# Altium PCB beta1.PCBDOC
Units mm, origin at the board's own origin, x right, y up, seen from the top; angles counter-clockwise.
Board outline 152.4 x 101.6 mm, 2 copper layers (Top Layer, Bottom Layer); 32 components, 39 nets, 118 pads, 0 vias.
Unrouted connection lines stored in the file: 1.
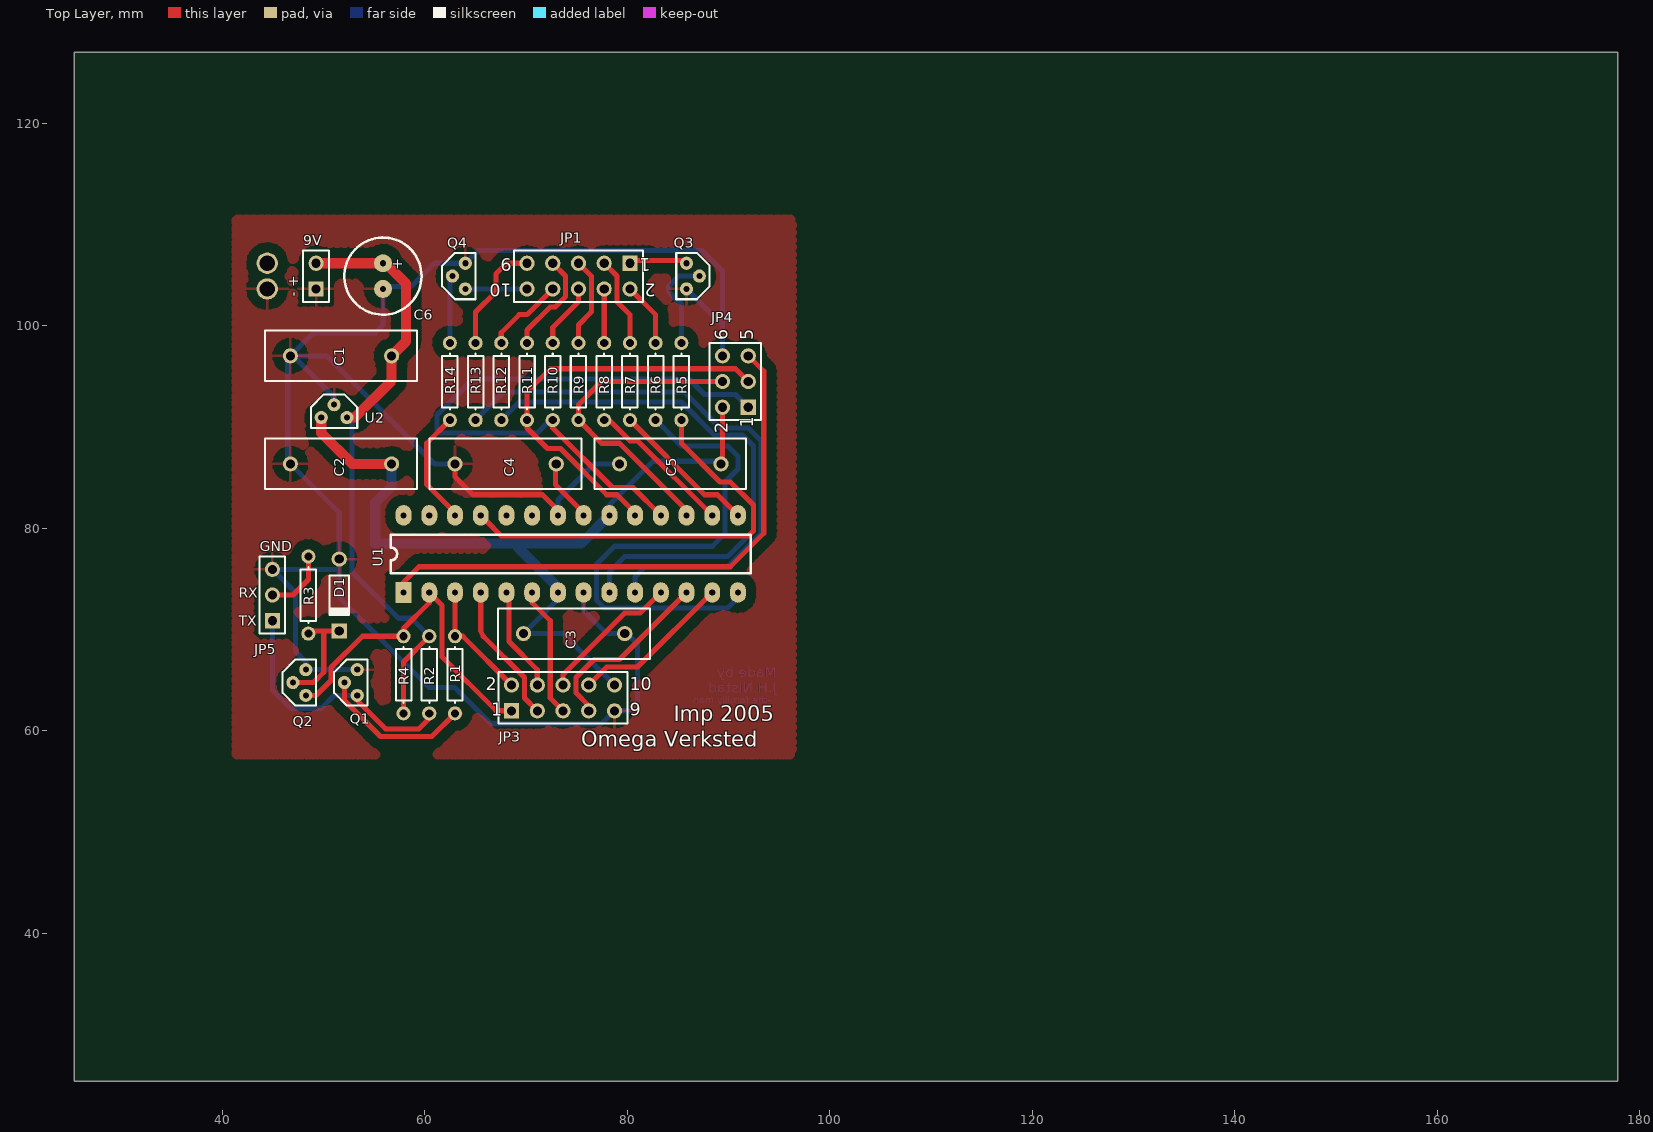
[diagram p0: Top Layer view]
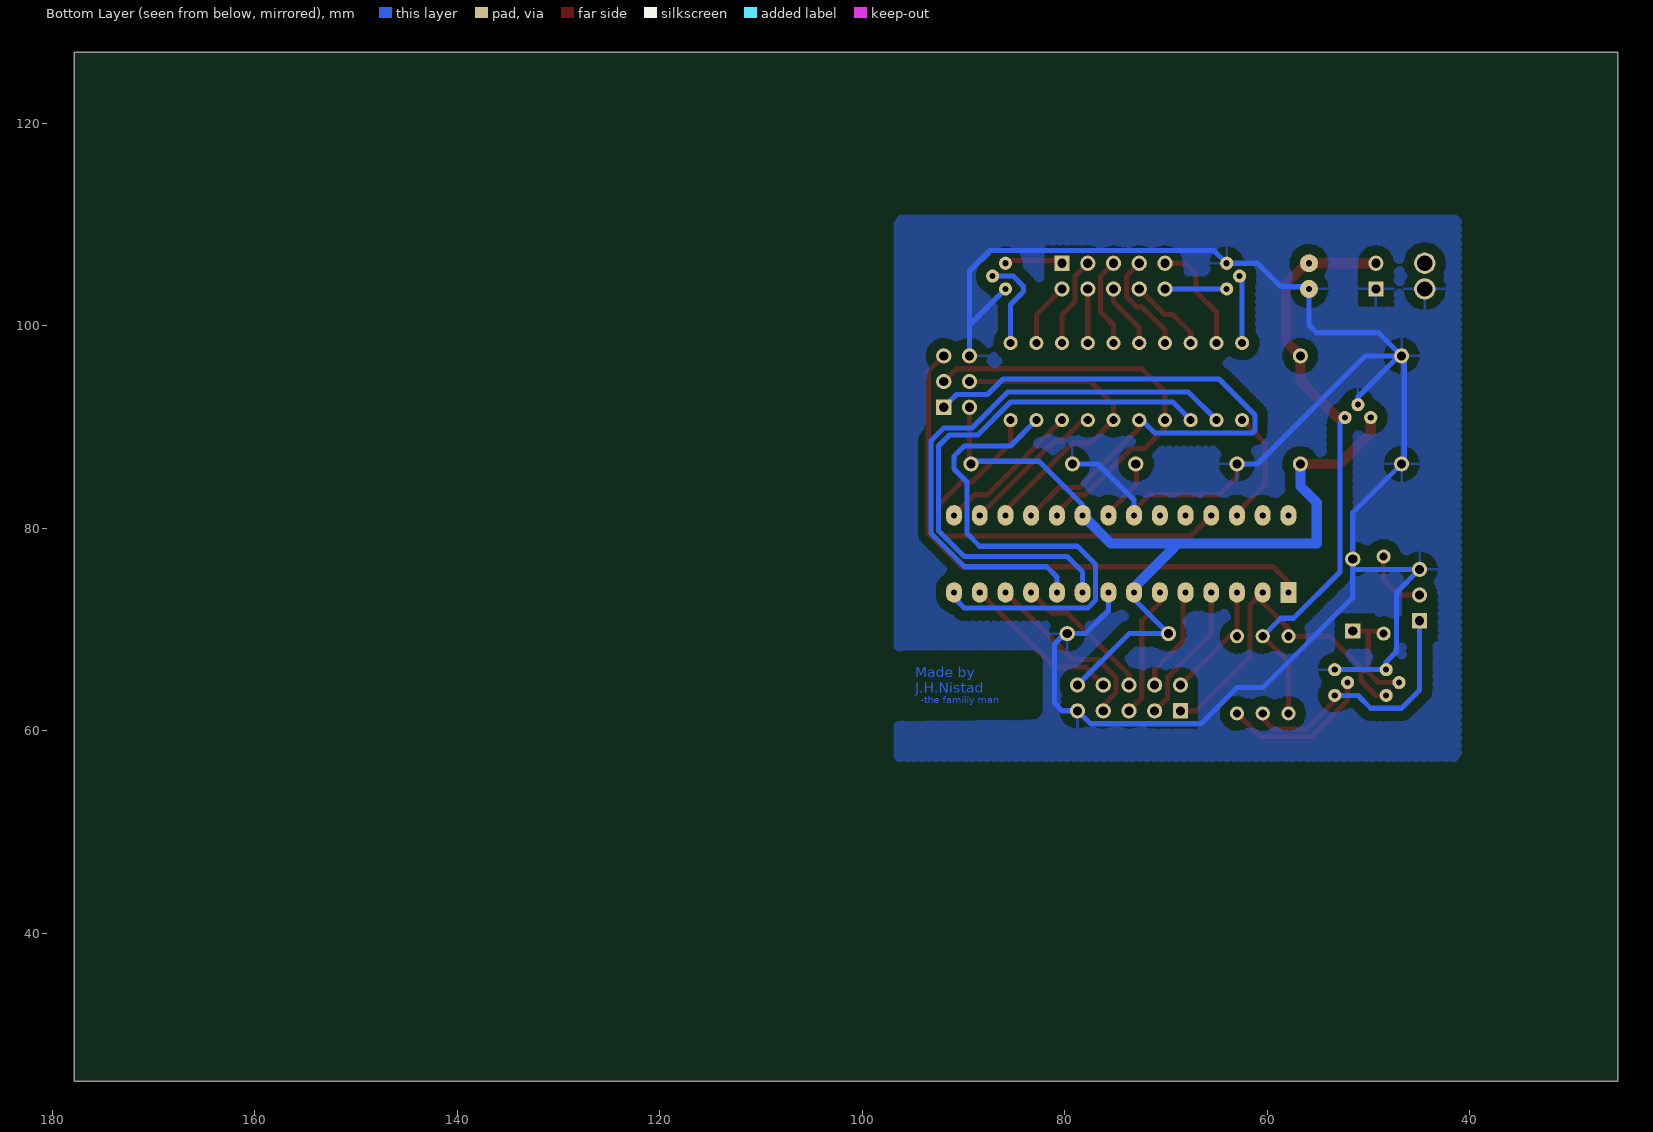
[diagram p1: Bottom Layer view, seen from below]

## Layer stack, top to bottom
Top Layer: signal copper 0.0356
Dielectric: dielectric 0.32, FR-4, Dk 4.8
Bottom Layer: signal copper 0.0356

## Board outline
25.4,25.4 177.8,25.4 177.8,127 25.4,127

## Design rules (kind name [scope] priority, off if disabled: settings)
Clearance [All] p1: gap=0.2
ComponentClearance [All] p1: gap=0.254 collisioncheckmode=0
MinimumAnnularRing [All] p1: minimumring=0.3
PolygonConnect [All] p1: connectstyle=Relief reliefconductorwidth=0.254 reliefentries=4 polygonreliefangle="90 Angle"
RoutingLayers [All] p1: top layer=Horizontal bottom layer="Not Used"
RoutingVias [All] p1: holewidth=0.711 width=1.27 viastyle="Through Hole" minholewidth=0.711 minwidth=1.27 maxholewidth=0.711 maxwidth=1.27
SolderMaskExpansion [All] p1: expansion=0.102
TestPointUsage [All] p1: valid=0 allowmultiple=FALSE
Testpoint [All] p1: side=15 testpointundercomponent=TRUE minsize=1.016 maxsize=2.54 preferedsize=1.524 minholesize=0 maxholesize=1.016 preferedholesize=0.813 testpointgrid=0.025 style=1023 order=1234567890
Width [All] p1: maxlimit=1 minlimit=0.254 preferedwidth=0.508
16 further rules are at their usual default settings.

## Components (designator, comment, footprint, x,y, rotation, side; value= is the part's Value field where it differs from the comment)
9V "Header 2" HDR1X2 49.276,103.632 r90 top (schematic designator JP2)
C1 "Cap" impcap 46.736,97.028 r0 top
C2 "Cap" impcap 46.736,86.36 r0 top
C3 "Cap" impcap 79.756,69.596 r180 top
C4 "Cap" impcap 62.992,86.36 r0 top
C5 "Cap" impcap 79.248,86.36 r0 top
C6 "Cap Pol1" RB.1/.3 55.88,106.172 r270 top
D1 "1N914" DIO7.1-3.9x1.9 51.562,73.406 r270 top
JP1 "Header 5X2" HDR2X5 80.264,106.172 r180 top
JP3 "Header 5X2" HDR2X5 68.58,61.976 r0 top
JP4 "Header 3X2" HDR2X3 91.948,91.948 r90 top
JP5 "Header 3" HDR1X3 44.958,70.866 r90 top
Q1 "BC547A" TO-92var2 53.34,66.04 r270 top
Q2 "BC547A" TO-92var2 48.26,66.04 r270 top
Q3 "BC547A" TO-92var2 85.852,103.632 r90 top
Q4 "BC547A" TO-92var2 64.008,106.172 r270 top
R1 "Res1" AXIAL-0.3 62.992,65.532 r270 top
R2 "Res1" AXIAL-0.3 60.452,65.532 r90 top
R3 "Res1" AXIAL-0.3 48.514,73.406 r270 top
R4 "Res1" AXIAL-0.3 57.912,65.532 r90 top
R5 "" AXIAL-0.3 85.344,94.488 r90 top
R6 "" AXIAL-0.3 82.804,94.488 r90 top
R7 "" AXIAL-0.3 80.264,94.488 r90 top
R8 "" AXIAL-0.3 77.724,94.488 r90 top
R9 "" AXIAL-0.3 75.184,94.488 r90 top
R10 "" AXIAL-0.3 72.644,94.488 r90 top
R11 "" AXIAL-0.3 70.104,94.488 r90 top
R12 "" AXIAL-0.3 67.564,94.488 r90 top
R13 "" AXIAL-0.3 65.024,94.488 r90 top
R14 "" AXIAL-0.3 62.484,94.488 r90 top
U1 "ATMEGA8_DIP28" DIP-28 57.912,73.66 r90 top
U2 "MC78L05CP" TO-92var2 52.324,90.932 r180 top

## Footprints (in the part's own frame and the unit in brackets; to place one, negate y for a bottom-side part, rotate by r counter-clockwise, add the part's x,y. Pads: shape width x height; smd on the part's side, far side on the other; paste and mask are expansions set on the pad)
AXIAL-0.3 [mm]
  round 1.4 hole 0.8: 1(-3.81,0) 2(3.81,0)
  silkscreen extent -2.77,-0.76 2.77,0.76
DIO7.1-3.9x1.9 [mm]
  round 1.5 hole 0.9: 1(-3.55,0)
  rect 1.5x1.5 hole 0.9: 2(3.55,0)
  silkscreen extent -1.95,-0.95 2.05,0.95
DIP-28 [mil]
  rect 80x62 hole 23.62: 1(0,0)
  oval 80x62 hole 23.62: 2(0,-100) 3(0,-200) 4(0,-300) 5(0,-400) 6(0,-500) 7(0,-600) 8(0,-700) 9(0,-800) 10(0,-900) 11(0,-1000) 12(0,-1100) 13(0,-1200) 14(0,-1300) 15(300,-1300) 16(300,-1200) 17(300,-1100) 18(300,-1000) 19(300,-900) 20(300,-800) 21(300,-700) 22(300,-600) 23(300,-500) 24(300,-400) 25(300,-300) 26(300,-200) 27(300,-100) 28(300,0)
  silkscreen extent 75,-1350 225,50
HDR1X2 [mm]
  rect 1.5x1.5 hole 0.9: 1(0,0)
  round 1.5 hole 0.9: 2(2.54,0)
  silkscreen extent -1.27,-1.27 3.81,1.27
HDR1X3 [mm]
  rect 1.5x1.5 hole 0.9: 1(0,0)
  round 1.5 hole 0.9: 2(2.54,0) 3(5.08,0)
  silkscreen extent -1.27,-1.27 6.35,1.27
HDR2X3 [mm]
  rect 1.5x1.5 hole 0.9: 1(0,0)
  round 1.5 hole 0.9: 2(0,2.54) 3(2.54,0) 4(2.54,2.54) 5(5.08,0) 6(5.08,2.54)
  silkscreen extent -1.27,-1.27 6.35,3.81
HDR2X5 [mm]
  rect 1.5x1.5 hole 0.9: 1(0,0)
  round 1.5 hole 0.9: 2(0,2.54) 3(2.54,0) 4(2.54,2.54) 5(5.08,0) 6(5.08,2.54) 7(7.62,0) 8(7.62,2.54) 9(10.16,0) 10(10.16,2.54)
  silkscreen extent -1.27,-1.27 11.43,3.81
impcap [mm]
  round 1.5 hole 0.9: 1(0,0) 2(10,0)
  silkscreen extent -2.5,-2.5 12.5,2.5
RB.1/.3 [mil]
  round 70 hole 23.62: 1(0,0) 2(100,0)
  silkscreen extent -100,-150 200,150
TO-92var2 [mm]
  round 1.3 hole 0.6: 1(2.54,0) 2(1.27,-1.27) 3(0,0)
  silkscreen extent -1.02,-2.29 3.56,1.02

## Part data
9V: "Header, 2-Pin"
C1 C2 C3 C4 C5: "Capacitor"
C6: "Polarized Capacitor (Radial)"
D1: "High Conductance Fast Diode"
JP1 JP3: "Header, 5-Pin, Dual row"
JP4: "Header, 3-Pin, Dual row"
JP5: "Header, 3-Pin"
Q1 Q2 Q3 Q4: "Amplifier Transistor NPN Silicon"
R1 R2 R3 R4: "Resistor"
R5 R6 R7 R8 R9 R10 R11 R12 R13 R14: library part Res1, "Resistor"
U1: "Atmel Microcontroller - Library created by carel..  <www.mpfreezone.com>"
U2: "3-Terminal Low-Current Positive Fixed Voltage Regulator"

## Free pads (board coordinates)
  round 2.1 hole 1.5: 0(44.45,106.172) 1(44.45,103.632)

## Nets (pads, with @x,y where several pads share a name; then routed paths per layer and width w, separated by ;. In a path a pad name is that pad's centre, name@x,y a point inside that pad or via, vN(x,y) a via of type N, cw(c..) or ccw(c..) an arc to the next point about the centre after c; other vN are vias at no path point)
9V: 9V.2 C1.2 C6.1 pad.0 R2.2 R4.1 U2.3 | length 60.7
  Top Layer w0.508: C6.1 C6.1@56.388,106.172 ; R4.1 57.912,66.802 R2.2
  Top Layer w1: 9V.2 C6.1 56.134,106.172 58.166,104.14 58.166,98.458 C1.2 56.736,94.582 53.086,90.932 U2.3
  Bottom Layer w0.508: U2.3 52.832,90.424 52.832,75.692 57.404,71.12 58.674,71.12 R2.2
GND: 9V.1 C1.1 C2.1 C3.1 C4.1 C5.1 C6.2 D1.1 JP3.9 JP4.6 JP5.3 pad.1 Q1.3 Q2.3 Q3.3 Q4.3 U1.8 U1.22 U2.2 | length 211.8
  Top Layer w0.508: C4.1 62.992,85.09 64.77,83.312 71.628,83.312 73.152,81.788 U1.22
  Bottom Layer w0.508: C1.1@46.482,97.028 46.482,86.614 51.562,81.534 51.562,73.152 60.452,64.262 62.992,64.262 66.548,60.706 77.47,60.706 JP3.9 80.264,61.976 81.026,62.738 81.026,68.58 C3.1@79.756,69.85 ; C1.1@46.99,97.028 51.054,92.964 U2.2 ; 51.562,76.2 51.308,75.946 JP5.3 47.238,73.666 47.238,67.824 48.26,66.802 Q2.3 Q1.3 ; C4.1 60.96,86.36 50.292,97.028 C1.1 49.022,99.314 55.118,99.314 55.88,100.076 C6.2 56.134,103.886 58.674,103.886 60.96,106.172 Q4.3 65.278,107.442 87.376,107.442 89.408,105.41 JP4.6 ; U1.22 73.152,82.804 76.708,86.36 C5.1 ; U1.8 75.692,71.882 77.978,69.596 C3.1 ; Q3.3 89.408,100.076
NetC4_2: C4.2 U1.21 | length 6.1
  Top Layer w0.508: C4.2@72.898,86.266 72.898,84.328 75.692,81.534 U1.21
NetD1_2: D1.2 Q2.2 R3.2 | length 10.7
  Top Layer w0.508: Q2.2 49.022,64.77 50.038,65.786 50.038,69.856 ; R3.2 48.774,69.856 D1.2
NetJP1_1: JP1.1 Q3.1 | length 5.7
  Top Layer w0.508: JP1.1@80.264,106.426 85.598,106.426 Q3.1
NetJP1_2: JP1.2 R6.2 | length 6.4
  Top Layer w0.508: JP1.2 82.804,101.092 R6.2
NetJP1_3: JP1.3 R7.2 | length 8.9
  Top Layer w0.508: JP1.3 78.994,104.902 78.994,102.362 80.264,101.092 R7.2
NetJP1_4: JP1.4 R8.2 | length 5.3
  Top Layer w0.508: R8.2 JP1.4
NetJP1_5: JP1.5 R9.2 | length 8.9
  Top Layer w0.508: R9.2 75.184,100.076 76.454,101.346 76.454,104.902 JP1.5
NetJP1_6: JP1.6 R10.2 | length 6.4
  Top Layer w0.508: R10.2 72.644,99.822 75.184,102.362 JP1.6
NetJP1_7: JP1.7 R11.2 | length 10.3
  Top Layer w0.508: R11.2 70.104,99.568 72.39,101.854 72.898,101.854 73.914,102.87 73.914,104.902 JP1.7
NetJP1_8: JP1.8 R12.2 | length 7.9
  Top Layer w0.508: R12.2 67.564,99.314 69.342,101.092 70.104,101.092 JP1.8
NetJP1_9: JP1.9 R13.2 | length 11.2
  Top Layer w0.508: R13.2 65.024,101.346 67.056,103.378 67.056,105.156 68.072,106.172 JP1.9
NetJP1_10: JP1.10 Q4.1 | length 6.1
  Bottom Layer w0.508: Q4.1 JP1.10
NetJP3_1: JP3.1 Q2.1 R4.2 U1.2 | length 33.4
  Top Layer w0.508: Q2.1 49.276,63.5 50.746,64.97 50.746,66.24 53.848,69.342 R4.2 ; 57.912,70.104 60.452,72.644 U1.2 61.722,72.39 61.722,67.31 67.056,61.976 JP3.1
NetJP3_2: JP3.2 R1.1 U1.3 | length 11.1
  Top Layer w0.508: R1.1 63.754,69.342 JP3.2 ; 62.992,70.104 U1.3
NetJP3_3: JP3.3 U1.4 | length 14
  Top Layer w0.508: U1.4 65.532,69.85 65.786,69.342 69.85,65.278 69.85,63.246 JP3.3
NetJP3_4: JP3.4 U1.5 | length 10.4
  Top Layer w0.508: U1.5 68.326,73.406 68.326,68.834 71.12,66.04 JP3.4
NetJP3_5: JP3.5 U1.6 | length 13.5
  Top Layer w0.508: U1.6 70.612,72.644 72.39,70.866 72.39,63.246 JP3.5 JP3.5@73.66,62.484
NetJP3_6: JP3.6 U1.11 | length 14
  Top Layer w0.508: JP3.6 73.66,65.532 79.756,71.628 81.28,71.628 U1.11
NetJP3_7: JP3.7 U1.12 | length 18.2
  Top Layer w0.408: JP3.7 JP3.7@76.2,62.484
  Top Layer w0.508: JP3.7@76.2,62.484 74.93,63.754 74.93,65.278 76.708,67.056 79.248,67.056 U1.12
NetJP3_8: JP3.8 U1.13 | length 16
  Top Layer w0.508: JP3.8 77.978,66.294 81.026,66.294 U1.13
NetJP4_1: JP4.1 R10.1 U1.18 | length 62
  Top Layer w0.508: R10.1 72.644,89.916 78.54,84.02 80.572,84.02 U1.18
  Bottom Layer w0.508: R10.1 72.39,90.678 71.12,89.408 61.468,89.408 61.214,89.662 61.214,91.186 64.77,94.742 86.106,94.742 87.63,93.218 90.678,93.218 JP4.1
NetJP4_3: JP4.3 R11.1 U1.19 | length 41
  Top Layer w0.508: U1.19@80.772,81.534 78.994,83.312 77.978,83.312 73.406,87.884 72.136,87.884 70.104,89.916 70.104,93.472 72.39,95.758 90.678,95.758 JP4.3
NetJP4_4: JP4.4 R9.1 U1.17 | length 31.8
  Top Layer w0.508: U1.17 U1.17@85.852,82.042 ; U1.17@85.852,81.788 79.248,88.392 77.47,88.392 R9.1 75.184,92.202 77.47,94.488 JP4.4
NetJP4_5: JP4.5 U1.1 | length 56.7
  Top Layer w0.508: U1.1 57.912,74.676 59.436,76.2 90.17,76.2 93.472,79.502 93.472,95.504 JP4.5
NetJP5_1: JP5.1 Q1.1 R2.1 | length 26.2
  Top Layer w0.508: Q1.1 53.34,62.992 56.134,60.198 59.436,60.198 60.452,61.214 R2.1
  Bottom Layer w0.508: JP5.1 44.958,64.008 46.736,62.23 49.784,62.23 51.054,63.5 Q1.1
NetJP5_2: JP5.2 R3.1 | length 6.5
  Top Layer w0.508: JP5.2 46.99,73.406 48.514,74.93 R3.1
NetQ1_2: Q1.2 R1.2 | length 15.6
  Top Layer w0.508: Q1.2 52.07,62.992 55.626,59.436 60.706,59.436 R1.2 R1.2@63.5,61.722
NetQ3_2: Q3.2 R5.2 | length 9.6
  Bottom Layer w0.508: R5.2 85.344,102.108 84.074,103.378 84.074,103.886 85.09,104.902 Q3.2
NetQ4_2: Q4.2 R14.2 | length 6.7
  Bottom Layer w0.508: R14.2 62.484,104.648 Q4.2
NetR5_1: R5.1 U1.25 | length 41.7
  Top Layer w0.508: U1.25@66.04,80.772 67.564,79.248 91.948,79.248 92.456,79.756 92.456,82.296 90.17,84.582 89.154,84.582 85.344,88.392 R5.1
NetR6_1: R6.1 U1.14 | length 50.5
  Bottom Layer w0.508: R6.1 85.344,88.138 89.916,88.138 90.932,87.122 90.932,85.852 89.662,84.582 89.662,79.502 88.392,78.232 78.74,78.232 76.962,76.454 76.962,72.898 77.724,72.136 89.916,72.136 90.932,73.152 U1.14
NetR7_1: R7.1 U1.15 | length 14.6
  Top Layer w0.508: R7.1 87.63,83.312 88.9,83.312 U1.15
NetR8_1: R8.1 U1.16 | length 14.6
  Top Layer w0.508: R8.1 78.232,90.678 80.264,88.646 81.026,88.646 U1.16
NetR12_1: R12.1 U1.9 | length 53.7
  Bottom Layer w0.508: R12.1 69.342,92.456 85.344,92.456 88.592,89.208 91.386,89.208 92.456,88.138 92.456,79.756 89.916,77.216 79.756,77.216 78.232,75.692 U1.9
NetR13_1: R13.1 U1.10 | length 56.2
  Bottom Layer w0.508: R13.1 67.818,93.472 85.598,93.472 89.154,89.916 91.948,89.916 93.218,88.646 93.218,79.517 89.901,76.2 81.788,76.2 80.772,75.184 U1.10
NetR14_1: R14.1 U1.26 | length 11.5
  Top Layer w0.508: R14.1 60.198,88.392 60.198,84.328 62.992,81.534 U1.26
VCC: C2.2 C3.2 C5.2 JP3.10 JP4.2 U1.7 U1.20 U2.1 | length 86.2
  Top Layer w0.508: C5.2 89.408,86.52 JP4.2
  Top Layer w1: U2.1 49.784,89.408 52.832,86.36 C2.2
  Bottom Layer w0.508: 68.834,78.486 69.184,78.136 ; U1.7 73.152,72.992 C3.2 73.66,69.596 JP3.10 ; U1.20@77.724,81.788 77.724,81.28 U1.20 ; U1.20@78.232,81.026 78.232,82.296 82.55,86.614 C5.2@88.994,86.614
  Bottom Layer w1: C2.2 56.736,84.168 55.118,82.55 55.118,78.486 75.438,78.486 U1.20 ; 69.184,78.136 73.152,74.168 U1.7
pads on no net: U1.23 U1.24 U1.27 U1.28

## Polygon pours and split planes (outlines as drawn)
GND on Top Layer (hatched 45Degree grid 0.508 track 1, remove dead copper): 41.402,110.49 41.402,57.658 96.266,57.658 96.266,110.49
GND on Bottom Layer (hatched 45Degree grid 0.508 track 1, remove dead copper): 41.278,110.484 41.278,57.398 96.396,57.398 96.396,110.484

## Other copper
Bottom Layer:
  text "Made by" at 94.742,65.278 h1
  text "J.H.Nistad" at 94.742,63.754 h1
  text "-the familiy man" at 94.234,62.738 h0.7

## Silkscreen, mask and mechanical layers (free items; w line width, h text height)
Top Overlay:
  text "- +" at 47.498,102.87 h1 r90
  text "GND" at 43.688,77.724 h1
  text "RX" at 41.656,73.152 h1
  text "TX" at 41.656,70.358 h1
  text "Imp 2005" at 84.582,60.96 h1.52
  text "Omega Verksted" at 75.438,58.42 h1.52
Mechanical 1:
  lines w0.254: 41.402,57.658 41.402,110.49 96.266,110.49 96.266,57.658 96.266,57.404 41.656,57.404 41.402,57.658

## Text inside footprints (layer, text, board x,y; h text height)
C6: Top Overlay "+" at 56.896,106.68 h1 r270
JP1: Top Overlay "2" at 82.804,104.14 h1.27 r180; Top Overlay "1" at 82.296,106.68 h1.27 r180; Top Overlay "9" at 68.58,106.68 h1.27 r180; Top Overlay "10" at 68.58,104.14 h1.27 r180
JP3: Top Overlay "10" at 80.264,64.008 h1.27; Top Overlay "9" at 80.264,61.468 h1.27; Top Overlay "1" at 66.548,61.468 h1.27; Top Overlay "2" at 66.04,64.008 h1.27
JP4: Top Overlay "1" at 92.456,89.916 h1.27 r90; Top Overlay "2" at 89.916,89.408 h1.27 r90; Top Overlay "5" at 92.456,98.552 h1.27 r90; Top Overlay "6" at 89.916,98.552 h1.27 r90